# Altium PCB Grabber_DIOT.PCBDOC (part 5 of 7)
Units mm, origin at the board's own origin, x right, y up, seen from the top; angles counter-clockwise.
Board outline 221.14 x 100 mm, 4 copper layers (TopLayer, MidLayer1, Internal layer GND, Bottom Layer), stack 1.607 mm thick; 234 components, 170 nets, 1025 pads, 389 vias.
Unrouted connection lines stored in the file: 2.
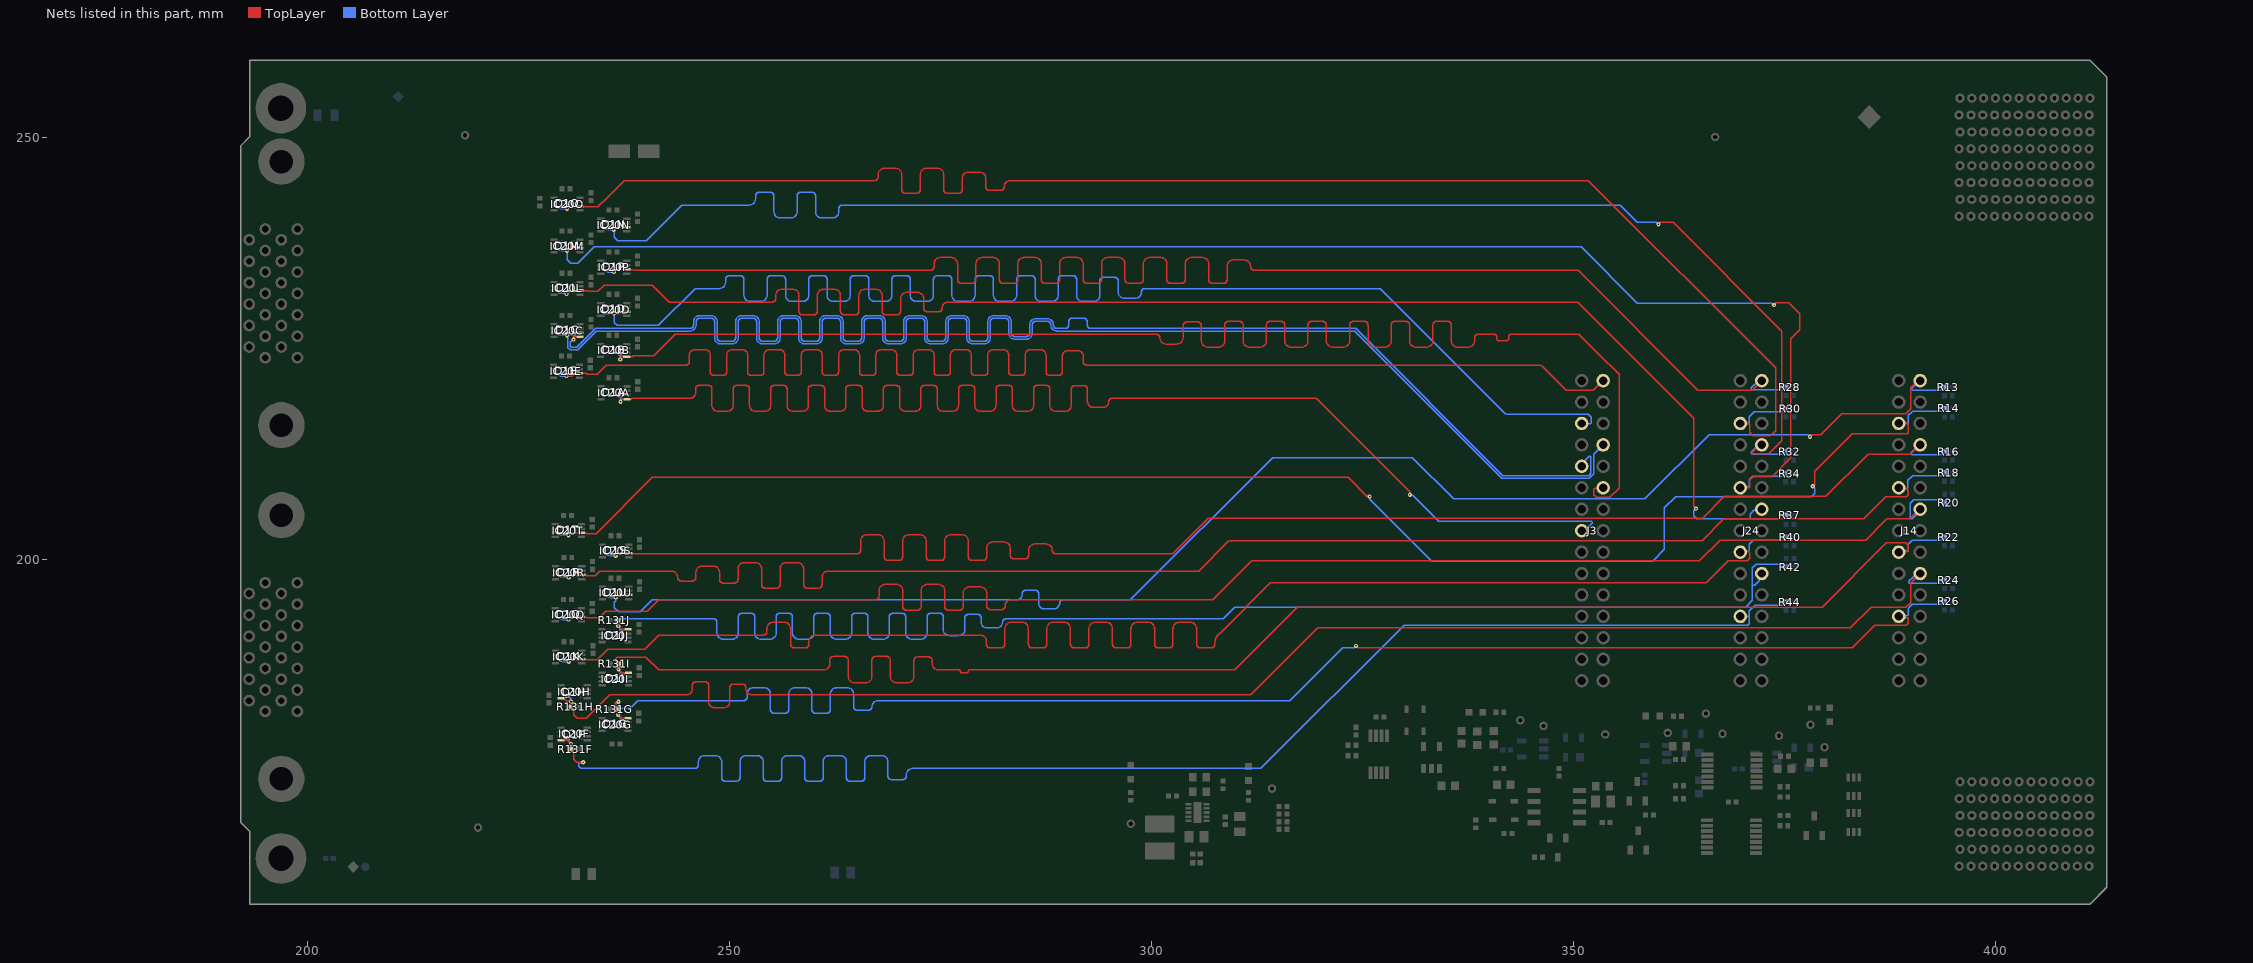
[diagram p6: the nets of this part, all layers, seen from the top]

## Via types
v1: diameter 0.5, hole 0.2, TopLayer to Bottom Layer, tented both sides, 374 vias
v2: diameter 0.8, hole 0.5, TopLayer to Bottom Layer, tented both sides, 15 vias

## Nets (pads, with @x,y where several pads share a name; then routed paths per layer and width w, separated by ;. In a path a pad name is that pad's centre, name@x,y a point inside that pad or via, vN(x,y) a via of type N, cw(c..) or ccw(c..) an arc to the next point about the centre after c; other vN are vias at no path point) (continued)
EEM_IO.LVDS_N18: D1C.6 IC20C.5 J3.9 | length 178.3
  TopLayer w0.152: v1@231.525,226.08 v1(231.554,226.051) ; v1@231.591,226.013 v1(231.554,226.051) ; IC20C.5@232.331,226.367 231.656,226.367 231.554,226.264 v1(231.554,226.051)
  Bottom Layer w0.152: v1(231.554,226.051) 231.493,226.051 231.186,225.744 231.186,225.235 231.275,225.146 231.915,225.146 233.947,227.177 234.047,227.277 234.136,227.366 245.112,227.366 245.341,227.366 ccw(c245.341,227.803) 245.778,227.803 245.778,228.148 cw(c246.52,228.148) 246.52,228.89 247.83,228.89 cw(c247.83,228.148) 248.572,228.148 248.572,226.279 ccw(c249.009,226.279) 249.009,225.842 250.32,225.842 ccw(c250.32,226.279) 250.756,226.279 250.756,228.148 cw(c251.498,228.148) 251.498,228.89 252.809,228.89 cw(c252.809,228.148) 253.55,228.148 253.55,226.279 ccw(c253.987,226.279) 253.987,225.842 255.298,225.842 ccw(c255.298,226.279) 255.735,226.279 255.735,228.148 cw(c256.476,228.148) 256.476,228.89 257.787,228.89 cw(c257.787,228.148) 258.529,228.148 258.529,226.279 ccw(c258.966,226.279) 258.966,225.842 260.276,225.842 ccw(c260.276,226.279) 260.713,226.279 260.713,228.148 cw(c261.455,228.148) 261.455,228.89 262.766,228.89 cw(c262.766,228.148) 263.507,228.148 263.507,226.279 ccw(c263.944,226.279) 263.944,225.842 265.255,225.842 ccw(c265.255,226.279) 265.692,226.279 265.692,228.148 cw(c266.433,228.148) 266.433,228.89 267.744,228.89 cw(c267.744,228.148) 268.486,228.148 268.486,226.279 ccw(c268.922,226.279) 268.922,225.842 270.233,225.842 ccw(c270.233,226.279) 270.67,226.279 270.67,228.148 cw(c271.412,228.148) 271.412,228.89 272.722,228.89 cw(c272.722,228.148) 273.464,228.148 273.464,226.279 ccw(c273.901,226.279) 273.901,225.842 275.212,225.842 ccw(c275.212,226.279) 275.648,226.279 275.648,228.148 cw(c276.39,228.148) 276.39,228.89 277.701,228.89 cw(c277.701,228.148) 278.442,228.148 278.442,226.279 ccw(c278.879,226.279) 278.879,225.842 280.19,225.842 ccw(c280.19,226.279) 280.627,226.279 280.627,228.148 cw(c281.368,228.148) 281.368,228.89 282.679,228.89 cw(c282.679,228.148) 283.421,228.148 283.421,226.838 ccw(c283.858,226.838) 283.858,226.401 285.168,226.401 ccw(c285.168,226.838) 285.605,226.838 285.605,227.803 cw(c286.347,227.803) 286.347,228.545 287.658,228.545 cw(c287.658,227.803) 288.399,227.803 ccw(c288.836,227.803) 288.836,227.366 289.718,227.366 289.794,227.366 ccw(c289.794,227.803) 290.231,227.803 290.231,228.164 cw(c290.668,228.164) 290.668,228.601 291.978,228.601 cw(c291.978,228.164) 292.415,228.164 292.415,227.803 ccw(c292.852,227.803) 292.852,227.366 293.878,227.366 324.236,227.366 341.661,209.941 351.821,209.941 352.105,210.225 352.102,210.229 352.102,212.151 352.013,212.24 351.886,212.24 351.01,211.364 J3.9@351.01,211.032 ; v1@231.571,226.068 D1C.6@231.571,226.692
EEM_IO.LVDS_N19: D1B.6 IC20B.5 J3.12 | length 179.3
  TopLayer w0.152: v1(237.079,223.701) 237.079,223.914 237.181,224.017 IC20B.5@237.856,224.017 238.524,224.017 238.632,224.125 241.032,224.125 243.587,226.681 294.04,226.681 300.586,226.681 cw(c300.586,226.244) 301.023,226.244 ccw(c301.742,226.244) 301.742,225.524 303.053,225.524 ccw(c303.053,226.244) 303.772,226.244 303.772,227.7 cw(c304.209,227.7) 304.209,228.137 305.52,228.137 cw(c305.52,227.7) 305.957,227.7 305.957,225.876 ccw(c306.676,225.876) 306.676,225.157 307.987,225.157 ccw(c307.987,225.876) 308.706,225.876 308.706,227.768 cw(c309.143,227.768) 309.143,228.205 310.454,228.205 cw(c310.454,227.768) 310.89,227.768 310.89,225.876 ccw(c311.61,225.876) 311.61,225.157 312.92,225.157 ccw(c312.92,225.876) 313.64,225.876 313.64,227.768 cw(c314.077,227.768) 314.077,228.205 315.387,228.205 cw(c315.387,227.768) 315.824,227.768 315.824,225.876 ccw(c316.544,225.876) 316.544,225.157 317.854,225.157 ccw(c317.854,225.876) 318.574,225.876 318.574,227.768 cw(c319.01,227.768) 319.01,228.205 320.321,228.205 cw(c320.321,227.768) 320.758,227.768 320.758,225.876 ccw(c321.477,225.876) 321.477,225.157 322.788,225.157 ccw(c322.788,225.876) 323.507,225.876 323.507,227.768 cw(c323.944,227.768) 323.944,228.205 325.255,228.205 cw(c325.255,227.768) 325.692,227.768 325.692,225.876 ccw(c326.411,225.876) 326.411,225.157 327.722,225.157 ccw(c327.722,225.876) 328.441,225.876 328.441,227.768 cw(c328.878,227.768) 328.878,228.205 330.189,228.205 cw(c330.189,227.768) 330.626,227.768 330.626,225.876 ccw(c331.345,225.876) 331.345,225.157 332.656,225.157 ccw(c332.656,225.876) 333.375,225.876 333.375,227.768 cw(c333.812,227.768) 333.812,228.205 335.122,228.205 cw(c335.122,227.768) 335.559,227.768 335.559,225.876 ccw(c336.279,225.876) 336.279,225.157 337.589,225.157 ccw(c337.589,225.876) 338.309,225.876 338.309,226.244 cw(c338.746,226.244) 338.746,226.681 338.963,226.681 339.149,226.681 340.647,226.681 cw(c340.647,226.396) 340.932,226.396 340.932,226.189 ccw(c341.216,226.189) 341.216,225.904 342.07,225.904 ccw(c342.07,226.189) 342.354,226.189 342.354,226.396 cw(c342.639,226.396) 342.639,226.681 344.551,226.681 350.659,226.681 353.015,224.325 353.049,224.325 355.43,221.944 355.43,208.434 354.337,207.341 352.75,207.341 352.417,207.674 352.417,208.32 352.542,208.445 353.503,208.445 J3.12@353.55,208.492
  Bottom Layer w0.152: v1(237.079,223.701) 237.096,223.718 D1B.6@237.096,224.342
EEM_IO.LVDS_N20: D1A.6 IC20A.5 J3.15 | length 179.2
  TopLayer w0.152: v1(237.114,218.677) 237.114,218.89 237.216,218.993 IC20A.5@237.891,218.993 238.392,218.993 238.49,219.09 245.112,219.09 245.336,219.09 ccw(c245.336,219.771) 246.017,219.771 246.017,220.228 cw(c246.403,220.228) 246.403,220.614 247.561,220.614 cw(c247.561,220.228) 247.947,220.228 247.947,218.247 ccw(c248.628,218.247) 248.628,217.566 249.786,217.566 ccw(c249.786,218.247) 250.466,218.247 250.466,220.228 cw(c250.853,220.228) 250.853,220.614 252.011,220.614 cw(c252.011,220.228) 252.397,220.228 252.397,218.247 ccw(c253.077,218.247) 253.077,217.566 254.236,217.566 ccw(c254.236,218.247) 254.916,218.247 254.916,220.228 cw(c255.302,220.228) 255.302,220.614 256.461,220.614 cw(c256.461,220.228) 256.847,220.228 256.847,218.247 ccw(c257.527,218.247) 257.527,217.566 258.686,217.566 ccw(c258.686,218.247) 259.366,218.247 259.366,220.228 cw(c259.752,220.228) 259.752,220.614 260.91,220.614 cw(c260.91,220.228) 261.297,220.228 261.297,218.247 ccw(c261.977,218.247) 261.977,217.566 263.135,217.566 ccw(c263.135,218.247) 263.816,218.247 263.816,220.228 cw(c264.202,220.228) 264.202,220.614 265.36,220.614 cw(c265.36,220.228) 265.746,220.228 265.746,218.247 ccw(c266.427,218.247) 266.427,217.566 267.585,217.566 ccw(c267.585,218.247) 268.266,218.247 268.266,220.228 cw(c268.652,220.228) 268.652,220.614 269.81,220.614 cw(c269.81,220.228) 270.196,220.228 270.196,218.247 ccw(c270.877,218.247) 270.877,217.566 272.035,217.566 ccw(c272.035,218.247) 272.716,218.247 272.716,220.228 cw(c273.102,220.228) 273.102,220.614 274.26,220.614 cw(c274.26,220.228) 274.646,220.228 274.646,218.247 ccw(c275.327,218.247) 275.327,217.566 276.485,217.566 ccw(c276.485,218.247) 277.166,218.247 277.166,220.228 cw(c277.552,220.228) 277.552,220.614 278.71,220.614 cw(c278.71,220.228) 279.096,220.228 279.096,218.247 ccw(c279.777,218.247) 279.777,217.566 280.935,217.566 ccw(c280.935,218.247) 281.615,218.247 281.615,220.228 cw(c282.001,220.228) 282.001,220.614 283.16,220.614 cw(c283.16,220.228) 283.546,220.228 283.546,218.247 ccw(c284.226,218.247) 284.226,217.566 285.385,217.566 ccw(c285.385,218.247) 286.065,218.247 286.065,220.228 cw(c286.451,220.228) 286.451,220.614 287.61,220.614 cw(c287.61,220.228) 287.996,220.228 287.996,218.247 ccw(c288.676,218.247) 288.676,217.566 289.834,217.566 ccw(c289.834,218.247) 290.515,218.247 290.515,220.188 cw(c290.901,220.188) 290.901,220.574 292.059,220.574 cw(c292.059,220.188) 292.445,220.188 292.445,218.704 ccw(c293.126,218.704) 293.126,218.023 294.284,218.023 ccw(c294.284,218.704) 294.965,218.704 cw(c295.351,218.704) 295.351,219.09 297.388,219.09 319.54,219.09 330.617,208.013 330.617,207.705 v1@330.639,207.683
  Bottom Layer w0.152: v1(237.114,218.677) 237.131,218.694 D1A.6@237.131,219.318 ; v1@330.81,207.646 330.81,207.627 330.975,207.627 333.914,204.688 334.093,204.509 352.185,204.509 352.275,204.42 352.275,204.294 351.393,203.412 J3.15@351.269,203.412
  other v1: 330.649,207.673
EEM_IO.LVDS_P0: D1U.1 IC20U.6 J14.2 R13.1 | length 184.4
  TopLayer w0.152: v1(236.562,195.484) 236.562,195.553 236.801,195.792 IC20U.6@238.101,195.792 ; v1(378.059,214.536) 378.072,214.536 378.322,214.786 379.341,214.786 381.794,217.239 389.379,217.239 389.975,217.835 389.975,220.361 390.81,221.195 J14.2@391.011,221.195
  Bottom Layer w0.152: D1U.1@235.761,195.617 235.894,195.484 v1(236.562,195.484) 236.569,195.476 236.569,195.104 236.381,194.916 236.381,194.31 236.393,194.297 236.879,193.812 239.454,193.812 240.848,195.207 283.84,195.207 284.056,195.207 ccw(c284.056,195.872) 284.722,195.872 284.722,195.967 cw(c285.108,195.967) 285.108,196.353 286.266,196.353 cw(c286.266,195.967) 286.652,195.967 286.652,194.821 ccw(c287.318,194.821) 287.318,194.155 288.476,194.155 ccw(c288.476,194.821) 289.141,194.821 cw(c289.527,194.821) 289.527,195.207 290.515,195.207 297.507,195.207 314.375,212.074 330.917,212.074 335.828,207.163 358.494,207.163 366.102,214.771 377.795,214.771 378.03,214.536 v1(378.059,214.536) ; J14.2@391.113,221.195 391.011,221.195 390.091,220.275 390.091,220.149 390.18,220.059 393.627,220.059 393.744,220.176 393.764,220.176 393.978,220.39 R13.1@393.978,220.41
EEM_IO.LVDS_P1: D1T.1 IC20T.6 J14.5 R14.1 | length 186.4
  TopLayer w0.152: v1(230.952,202.858) 230.952,202.927 231.191,203.166 IC20T.6@232.491,203.166 232.992,203.166 233.09,203.068 234.226,203.068 240.784,209.626 240.873,209.715 323.362,209.715 325.566,207.511 325.76,207.511 v1@325.788,207.483 ; v1(378.39,208.671) 378.39,208.715 378.609,208.934 378.609,210.465 383.055,214.911 389.566,214.911 389.691,215.036 389.691,215.974 389.541,216.124 388.585,216.124 J14.5@388.575,216.113
  Bottom Layer w0.152: D1T.1@230.151,202.991 230.284,202.858 v1(230.952,202.858) ; v1@325.885,207.355 325.92,207.32 325.92,207.121 333.229,199.812 359.438,199.812 360.813,201.187 360.813,203.172 360.813,206.131 362.124,207.442 378.239,207.442 378.634,207.838 378.634,208.407 378.464,208.577 378.39,208.577 v1(378.39,208.671) ; J14.5@388.575,216.113 388.585,216.124 389.63,216.124 389.72,216.213 389.72,216.541 389.72,217.065 390.113,217.458 390.194,217.539 393.667,217.539 393.789,217.661 393.789,217.681 R14.1@394.005,217.897
  other v1: 325.878,207.45
EEM_IO.LVDS_P2: D1S.1 IC20S.6 J14.8 R16.1 | length 186.3
  TopLayer w0.152: v1(236.562,200.45) 236.562,200.519 236.801,200.758 IC20S.6@238.101,200.758 238.163,200.695 238.664,200.695 238.7,200.66 264.899,200.66 265.127,200.66 ccw(c265.127,201.097) 265.564,201.097 265.564,202.187 cw(c266.306,202.187) 266.306,202.928 267.617,202.928 cw(c267.617,202.187) 268.358,202.187 268.358,200.317 ccw(c268.795,200.317) 268.795,199.88 270.106,199.88 ccw(c270.106,200.317) 270.543,200.317 270.543,202.187 cw(c271.284,202.187) 271.284,202.928 272.595,202.928 cw(c272.595,202.187) 273.337,202.187 273.337,200.317 ccw(c273.774,200.317) 273.774,199.88 275.084,199.88 ccw(c275.084,200.317) 275.521,200.317 275.521,202.187 cw(c276.263,202.187) 276.263,202.928 277.573,202.928 cw(c277.573,202.187) 278.315,202.187 278.315,200.317 ccw(c278.752,200.317) 278.752,199.88 280.063,199.88 ccw(c280.063,200.317) 280.499,200.317 280.499,201.328 cw(c281.241,201.328) 281.241,202.07 282.552,202.07 cw(c282.552,201.328) 283.293,201.328 283.293,200.508 ccw(c283.73,200.508) 283.73,200.071 285.041,200.071 ccw(c285.041,200.508) 285.478,200.508 285.478,201.097 cw(c286.22,201.097) 286.22,201.839 287.53,201.839 cw(c287.53,201.097) 288.272,201.097 ccw(c288.709,201.097) 288.709,200.66 291.732,200.66 302.53,200.66 306.745,204.875 365.335,204.875 367.92,207.46 379.943,207.46 384.938,212.454 385.19,212.454 385.203,212.442 389.948,212.442 391.08,213.573 J14.8@391.115,213.573
  Bottom Layer w0.152: D1S.1@235.761,200.583 235.894,200.45 v1(236.562,200.45) ; J14.8@391.115,213.573 390.99,213.573 390.039,212.622 390.039,212.496 390.128,212.407 393.629,212.407 393.771,212.549 393.791,212.549 394.005,212.762 R16.1@394.005,212.782
EEM_IO.LVDS_P3: D1R.1 IC20R.6 J14.11 R18.1 | length 186.7
  TopLayer w0.152: v1(230.987,197.867) 230.987,197.936 231.226,198.175 IC20R.6@232.526,198.175 233.027,198.175 233.125,198.077 234.096,198.077 234.64,198.621 240.976,198.621 243.135,198.621 cw(c243.135,197.88) 243.877,197.88 ccw(c244.314,197.88) 244.314,197.443 245.624,197.443 ccw(c245.624,197.88) 246.061,197.88 246.061,198.469 cw(c246.803,198.469) 246.803,199.211 248.113,199.211 cw(c248.113,198.469) 248.855,198.469 248.855,197.635 ccw(c249.292,197.635) 249.292,197.198 250.603,197.198 ccw(c250.603,197.635) 251.039,197.635 251.039,198.879 cw(c251.781,198.879) 251.781,199.62 253.092,199.62 cw(c253.092,198.879) 253.833,198.879 253.833,197.009 ccw(c254.27,197.009) 254.27,196.572 255.581,196.572 ccw(c255.581,197.009) 256.018,197.009 256.018,198.879 cw(c256.76,198.879) 256.76,199.62 258.07,199.62 cw(c258.07,198.879) 258.812,198.879 258.812,197.009 ccw(c259.249,197.009) 259.249,196.572 260.559,196.572 ccw(c260.559,197.009) 260.996,197.009 260.996,197.88 cw(c261.738,197.88) 261.738,198.621 261.967,198.621 305.62,198.621 309.154,202.156 309.243,202.245 365.268,202.245 367.728,204.706 367.818,204.795 384.403,204.795 386.948,207.341 387.037,207.43 389.488,207.43 389.718,207.66 389.718,208.156 389.52,208.354 J14.11@388.714,208.354
  Bottom Layer w0.152: D1R.1@230.186,198 230.319,197.867 v1(230.987,197.867) ; J14.11@388.575,208.493 388.714,208.354 389.52,208.354 389.671,208.504 389.671,208.714 389.671,209.37 390.234,209.933 393.68,209.933 393.771,210.024 393.791,210.024 394.005,210.238 R18.1@394.005,210.258
EEM_IO.LVDS_P4: D1Q.1 IC20Q.6 J14.14 R20.1 | length 188.5
  TopLayer w0.152: v1(230.952,192.884) 230.952,192.953 231.191,193.192 IC20Q.6@232.491,193.192 232.541,193.142 233.066,193.142 233.114,193.094 234.604,193.094 235.38,193.87 240.291,193.87 241.664,195.242 267.097,195.242 267.326,195.242 ccw(c267.326,195.679) 267.763,195.679 267.763,196.304 cw(c268.504,196.304) 268.504,197.046 269.815,197.046 cw(c269.815,196.304) 270.557,196.304 270.557,194.434 ccw(c270.994,194.434) 270.994,193.998 272.304,193.998 ccw(c272.304,194.434) 272.741,194.434 272.741,196.304 cw(c273.483,196.304) 273.483,197.046 274.793,197.046 cw(c274.793,196.304) 275.535,196.304 275.535,194.434 ccw(c275.972,194.434) 275.972,193.998 277.283,193.998 ccw(c277.283,194.434) 277.72,194.434 277.72,196.007 cw(c278.461,196.007) 278.461,196.749 279.772,196.749 cw(c279.772,196.007) 280.514,196.007 280.514,194.5 ccw(c280.95,194.5) 280.95,194.064 282.261,194.064 ccw(c282.261,194.5) 282.698,194.5 cw(c283.44,194.5) 283.44,195.242 285.204,195.242 307.267,195.242 311.773,199.748 311.862,199.838 364.957,199.838 367.41,202.29 384.668,202.29 387.118,204.74 387.207,204.829 389.89,204.829 391.015,205.953 J14.14@391.115,205.953
  Bottom Layer w0.152: D1Q.1@230.151,193.017 230.284,192.884 v1(230.952,192.884) ; J14.14@391.115,205.953 391.115,205.779 390.158,204.823 390.032,204.823 389.943,204.912 389.943,206.679 390.354,207.091 393.646,207.091 393.771,206.966 393.809,206.966 393.975,206.8 R20.1@393.975,206.707
EEM_IO.LVDS_P5: D1I.4 IC20I.8 J14.17 R22.1 R131I.2 | length 185
  TopLayer w0.152: R131I.2@236.866,187.635 R131I.2@236.866,187.655 ; IC20I.8@238.051,186.585 237.27,186.585 v1(236.866,186.989) R131I.2@236.866,187.655 ; J14.17@388.575,200.873 388.643,200.942 389.528,200.942 389.693,201.107 389.693,201.675 389.413,201.955 387.093,201.955 379.488,194.351 317.306,194.351 309.874,186.919 279.757,186.919 278.466,186.919 ccw(c278.466,186.766) 278.313,186.766 278.313,186.723 cw(c278.176,186.723) 278.176,186.586 277.536,186.586 cw(c277.536,186.723) 277.399,186.723 277.399,186.766 ccw(c277.247,186.766) 277.247,186.919 276.256,186.919 276.231,186.919 274.801,186.919 cw(c274.801,187.66) 274.059,187.66 274.059,188.008 ccw(c273.622,188.008) 273.622,188.445 272.311,188.445 ccw(c272.311,188.008) 271.875,188.008 271.875,186.136 cw(c271.133,186.136) 271.133,185.395 269.822,185.395 cw(c269.822,186.136) 269.081,186.136 269.081,188.067 ccw(c268.644,188.067) 268.644,188.504 267.333,188.504 ccw(c267.333,188.067) 266.896,188.067 266.896,186.136 cw(c266.154,186.136) 266.154,185.395 264.844,185.395 cw(c264.844,186.136) 264.102,186.136 264.102,188.067 ccw(c263.665,188.067) 263.665,188.504 262.355,188.504 ccw(c262.355,188.067) 261.918,188.067 261.918,187.66 cw(c261.176,187.66) 261.176,186.919 260.947,186.919 241.643,186.919 240.13,188.432 236.741,188.432 236.548,188.239 236.548,187.958 236.638,187.868 236.652,187.868 R131I.2@236.866,187.655
  Bottom Layer w0.152: v1(236.866,186.989) 237.101,186.754 237.101,186.6 D1I.4@237.291,186.41 ; J14.17@388.575,200.873 388.648,200.946 389.628,200.946 389.718,201.036 389.718,201.838 389.8,201.919 390.157,202.277 393.648,202.277 393.771,202.4 393.791,202.4 394.005,202.613 R22.1@394.005,202.633
EEM_IO.LVDS_P6: D1H.4 IC20H.8 J14.20 R24.1 R131H.2 | length 185.1
  TopLayer w0.152: IC20H.8@230.074,183.574 230.349,183.574 230.753,183.17 v1(231.259,183.17) 231.259,182.504 231.565,182.197 231.565,181.594 231.998,181.162 233.047,181.162 235.855,183.969 244.751,183.969 244.967,183.969 ccw(c244.967,184.635) 245.632,184.635 245.632,185.107 cw(c246.018,185.107) 246.018,185.493 247.177,185.493 cw(c247.177,185.107) 247.563,185.107 247.563,183.111 ccw(c248.228,183.111) 248.228,182.445 249.386,182.445 ccw(c249.386,183.111) 250.052,183.111 250.052,184.827 cw(c250.438,184.827) 250.438,185.213 251.596,185.213 cw(c251.596,184.827) 251.982,184.827 251.982,184.635 ccw(c252.648,184.635) 252.648,183.969 253.709,183.969 311.807,183.969 319.722,191.884 382.84,191.884 385.305,194.349 389.428,194.349 389.973,194.893 389.973,197.157 391.115,198.299 J14.20@391.115,198.333
  Bottom Layer w0.152: D1H.4@230.834,183.749 230.908,183.675 231.048,183.675 231.192,183.531 231.192,183.236 v1(231.259,183.17) ; J14.20@391.115,198.333 390.838,198.056 390.446,198.056 390.354,197.964 390.334,197.964 389.777,197.407 389.777,197.281 389.866,197.192 393.634,197.192 393.769,197.326 393.789,197.326 394.003,197.54 R24.1@394.003,197.56
EEM_IO.LVDS_P7: D1G.4 IC20G.8 J14.23 R26.1 R131G.2 | length 184.7
  TopLayer w0.152: v1(236.866,183.135) 236.8,183.069 236.63,183.069 236.506,182.945 236.506,182.586 236.831,182.262 v1(236.831,181.596) 237.235,181.192 IC20G.8@238.016,181.192 ; v1(324.27,189.757) 324.488,189.54 383.066,189.54 385.622,192.095 385.704,192.177 389.43,192.177 389.481,192.228 389.714,192.461 389.714,192.967 389.561,193.12 388.708,193.12 J14.23@388.575,193.253
  Bottom Layer w0.152: v1(236.831,181.596) 237.066,181.361 237.066,181.207 D1G.4@237.256,181.017 ; v1(236.866,183.135) 236.772,183.135 236.636,182.999 236.63,182.999 236.541,182.91 236.541,182.564 236.71,182.395 238.26,182.395 239.133,183.268 251.474,183.268 251.69,183.268 ccw(c251.69,183.705) 252.127,183.705 252.127,184.076 cw(c252.843,184.076) 252.843,184.792 254.154,184.792 cw(c254.154,184.076) 254.87,184.076 254.87,182.219 ccw(c255.307,182.219) 255.307,181.782 256.618,181.782 ccw(c256.618,182.219) 257.055,182.219 257.055,184.076 cw(c257.771,184.076) 257.771,184.792 259.082,184.792 cw(c259.082,184.076) 259.798,184.076 259.798,182.219 ccw(c260.235,182.219) 260.235,181.782 261.545,181.782 ccw(c261.545,182.219) 261.982,182.219 261.982,184.074 cw(c262.699,184.074) 262.699,184.79 264.009,184.79 cw(c264.009,184.074) 264.726,184.074 264.726,182.552 ccw(c265.162,182.552) 265.162,182.115 266.473,182.115 ccw(c266.473,182.552) 266.91,182.552 cw(c267.626,182.552) 267.626,183.268 268.936,183.268 316.411,183.268 322.683,189.54 324.053,189.54 v1(324.27,189.757) ; J14.23@388.575,193.253 388.625,193.304 389.584,193.304 389.673,193.393 389.673,194.172 389.755,194.254 390.166,194.665 393.647,194.665 393.769,194.787 393.789,194.787 394.003,195.001 R26.1@394.003,195.021
EEM_IO.LVDS_P8: D1P.1 IC20P.6 J24.2 R28.1 | length 186.6
  TopLayer w0.152: v1(236.327,234.059) 236.327,234.128 236.566,234.367 IC20P.6@237.866,234.367 237.897,234.335 238.581,234.335 238.66,234.255 273.613,234.255 273.837,234.255 ccw(c273.837,234.692) 274.273,234.692 274.273,235.047 cw(c275.006,235.047) 275.006,235.779 276.317,235.779 cw(c276.317,235.047) 277.049,235.047 277.049,233.168 ccw(c277.486,233.168) 277.486,232.731 278.797,232.731 ccw(c278.797,233.168) 279.233,233.168 279.233,235.047 cw(c279.966,235.047) 279.966,235.779 281.277,235.779 cw(c281.277,235.047) 282.009,235.047 282.009,233.168 ccw(c282.446,233.168) 282.446,232.731 283.757,232.731 ccw(c283.757,233.168) 284.193,233.168 284.193,235.047 cw(c284.926,235.047) 284.926,235.779 286.237,235.779 cw(c286.237,235.047) 286.969,235.047 286.969,233.168 ccw(c287.406,233.168) 287.406,232.731 288.717,232.731 ccw(c288.717,233.168) 289.153,233.168 289.153,235.047 cw(c289.886,235.047) 289.886,235.779 291.197,235.779 cw(c291.197,235.047) 291.929,235.047 291.929,233.168 ccw(c292.366,233.168) 292.366,232.731 293.677,232.731 ccw(c293.677,233.168) 294.113,233.168 294.113,235.047 cw(c294.846,235.047) 294.846,235.779 296.157,235.779 cw(c296.157,235.047) 296.889,235.047 296.889,233.168 ccw(c297.326,233.168) 297.326,232.731 298.637,232.731 ccw(c298.637,233.168) 299.073,233.168 299.073,235.047 cw(c299.806,235.047) 299.806,235.779 301.117,235.779 cw(c301.117,235.047) 301.849,235.047 301.849,233.168 ccw(c302.286,233.168) 302.286,232.731 303.597,232.731 ccw(c303.597,233.168) 304.033,233.168 304.033,235.047 cw(c304.766,235.047) 304.766,235.779 306.077,235.779 cw(c306.077,235.047) 306.809,235.047 306.809,233.168 ccw(c307.246,233.168) 307.246,232.731 308.557,232.731 ccw(c308.557,233.168) 308.993,233.168 308.993,234.752 cw(c309.726,234.752) 309.726,235.484 311.037,235.484 cw(c311.037,234.752) 311.769,234.752 311.769,234.692 ccw(c312.206,234.692) 312.206,234.255 314.696,234.255 350.578,234.255 364.781,220.052 370.818,220.052 371.205,220.052 372.143,220.99 372.143,221.192 J24.2@372.345,221.192
  Bottom Layer w0.152: D1P.1@235.526,234.192 235.659,234.059 v1(236.327,234.059) ; J24.2@372.345,221.192 371.989,221.192 371.12,220.323 371.12,220.197 371.209,220.107 374.885,220.107 374.964,220.186 374.984,220.186 375.198,220.4 R28.1@375.198,220.42
EEM_IO.LVDS_P9: D1O.1 IC20O.6 J24.5 R30.1 | length 187.1
  TopLayer w0.152: v1(230.792,241.559) 230.792,241.628 231.031,241.867 IC20O.6@232.331,241.867 232.405,241.793 232.748,241.793 232.769,241.772 234.414,241.772 235.585,242.943 237.541,244.898 266.983,244.898 267.212,244.898 ccw(c267.212,245.335) 267.649,245.335 267.649,245.608 cw(c268.39,245.608) 268.39,246.35 269.701,246.35 cw(c269.701,245.608) 270.443,245.608 270.443,243.811 ccw(c270.88,243.811) 270.88,243.374 272.19,243.374 ccw(c272.19,243.811) 272.627,243.811 272.627,245.608 cw(c273.369,245.608) 273.369,246.35 274.679,246.35 cw(c274.679,245.608) 275.421,245.608 275.421,243.811 ccw(c275.858,243.811) 275.858,243.374 277.169,243.374 ccw(c277.169,243.811) 277.605,243.811 277.605,245.166 cw(c278.347,245.166) 278.347,245.907 279.658,245.907 cw(c279.658,245.166) 280.399,245.166 280.399,244.157 ccw(c280.836,244.157) 280.836,243.72 282.147,243.72 ccw(c282.147,244.157) 282.584,244.157 cw(c283.326,244.157) 283.326,244.898 284.171,244.898 351.8,244.898 373.995,222.703 373.995,215.251 373.376,214.632 371.363,214.632 370.932,215.062 370.932,216.013 370.833,216.112 J24.5@369.805,216.112
  Bottom Layer w0.152: D1O.1@229.991,241.692 230.124,241.559 v1(230.792,241.559) ; J24.5@369.855,216.062 369.868,216.076 370.744,216.076 370.867,216.199 370.867,216.901 371.448,217.482 374.851,217.482 375.011,217.643 375.031,217.643 375.245,217.857 R30.1@375.245,217.877
EEM_IO.LVDS_P10: D1N.1 IC20N.6 J24.8 R32.1 | length 184.7
  TopLayer w0.152: v1(236.327,239.059) 236.327,239.128 236.566,239.367 IC20N.6@237.866,239.367 ; v1(360.101,239.712) 360.143,239.712 360.364,239.933 361.866,239.933 374.733,227.066 374.733,214.072 373.172,212.51 371.296,212.51 371.206,212.6 371.206,212.726 372.053,213.572 J24.8@372.345,213.572
  Bottom Layer w0.152: D1N.1@235.526,239.192 235.659,239.059 v1(236.327,239.059) 236.358,239.028 236.358,238.185 236.788,237.755 240.14,237.755 244.384,241.998 252.18,241.998 252.396,241.998 ccw(c252.396,242.715) 253.112,242.715 253.112,243.086 cw(c253.549,243.086) 253.549,243.522 254.86,243.522 cw(c254.86,243.086) 255.297,243.086 255.297,241.191 ccw(c256.013,241.191) 256.013,240.474 257.324,240.474 ccw(c257.324,241.191) 258.04,241.191 258.04,243.086 cw(c258.477,243.086) 258.477,243.522 259.787,243.522 cw(c259.787,243.086) 260.224,243.086 260.224,241.191 ccw(c260.941,241.191) 260.941,240.474 262.251,240.474 ccw(c262.251,241.191) 262.967,241.191 262.967,241.562 cw(c263.404,241.562) 263.404,241.998 264.907,241.998 355.549,241.998 357.617,239.931 359.833,239.931 360.051,239.712 v1(360.101,239.712) ; J24.8@372.345,213.572 371.973,213.572 371.082,212.682 371.082,212.555 371.171,212.466 374.845,212.466 374.934,212.555 374.973,212.555 375.187,212.769 R32.1@375.187,212.789
EEM_IO.LVDS_P11: D1M.1 IC20M.6 J24.11 R34.1 | length 186.1
  TopLayer w0.152: v1(230.792,236.566) 230.792,236.635 231.031,236.874 IC20M.6@232.331,236.874 ; J24.11@369.805,208.492 369.829,208.468 370.833,208.468 370.922,208.557 370.922,208.753 370.922,209.424 371.318,209.819 373.559,209.819 375.768,212.028 375.768,226.136 376.852,227.22 376.852,229.114 375.567,230.398 374.022,230.398 v1@373.819,230.194
  Bottom Layer w0.152: D1M.1@229.991,236.699 230.124,236.566 v1(230.792,236.566) ; v1@230.797,236.561 230.797,235.516 231.193,235.119 232.063,235.119 233.992,237.048 350.932,237.048 357.598,230.382 373.542,230.382 373.79,230.135 v1(373.805,230.135) ; J24.11@369.805,208.492 369.894,208.582 370.782,208.582 370.873,208.673 370.873,209.448 371.276,209.851 374.808,209.851 374.94,209.984 374.96,209.984 375.174,210.197 R34.1@375.174,210.217
EEM_IO.LVDS_P12: D1L.1 IC20L.6 J24.14 R37.1 | length 184.9
  TopLayer w0.152: v1(230.725,231.446) 231.145,231.867 231.982,231.867 IC20L.6@232.331,231.867 ; IC20L.6@232.563,231.837 233.246,231.837 233.325,231.758 234.448,231.758 235.184,232.493 240.882,232.493 242.88,230.495 254.86,230.495 255.076,230.495 ccw(c255.076,230.932) 255.513,230.932 255.513,231.303 cw(c256.229,231.303) 256.229,232.019 257.539,232.019 cw(c257.539,231.303) 258.256,231.303 258.256,229.408 ccw(c258.693,229.408) 258.693,228.971 260.003,228.971 ccw(c260.003,229.408) 260.44,229.408 260.44,231.303 cw(c261.156,231.303) 261.156,232.019 262.467,232.019 cw(c262.467,231.303) 263.183,231.303 263.183,229.408 ccw(c263.62,229.408) 263.62,228.971 264.931,228.971 ccw(c264.931,229.408) 265.368,229.408 265.368,231.303 cw(c266.084,231.303) 266.084,232.019 267.395,232.019 cw(c267.395,231.303) 268.111,231.303 268.111,229.408 ccw(c268.548,229.408) 268.548,228.971 269.858,228.971 ccw(c269.858,229.408) 270.295,229.408 270.295,230.929 cw(c271.012,230.929) 271.012,231.645 272.322,231.645 cw(c272.322,230.929) 273.039,230.929 273.039,229.779 ccw(c273.475,229.779) 273.475,229.342 274.786,229.342 ccw(c274.786,229.779) 275.223,229.779 cw(c275.939,229.779) 275.939,230.495 278.347,230.495 350.564,230.495 364.312,216.747 364.312,206.284 364.55,206.046 v1(364.55,206.021)
  Bottom Layer w0.152: D1L.1@229.991,231.692 230.065,231.618 230.459,231.618 230.631,231.446 v1(230.725,231.446) v1@230.752,231.419 ; v1(364.55,206.021) 364.55,206.019 364.284,205.753 364.284,205.201 364.638,204.847 370.969,204.847 ; J24.14@372.068,205.675 J24.14@372.345,205.952 ; J24.14@372.068,205.953 371.927,205.813 371.405,205.813 370.969,205.377 370.969,204.847 ; R37.1@375.212,205.18 375.177,205.18 374.844,204.847 370.969,204.847
EEM_IO.LVDS_P13: D1K.1 IC20K.6 J24.17 R40.1 | length 186.5
  TopLayer w0.152: v1(230.987,187.885) 230.987,187.954 231.226,188.193 IC20K.6@232.526,188.193 233.027,188.193 233.125,188.095 234.375,188.095 235.625,189.345 239.96,189.345 241.654,191.038 248.434,191.038 254.03,191.038 ccw(c254.03,191.475) 254.466,191.475 254.466,191.821 cw(c255.208,191.821) 255.208,192.562 256.519,192.562 cw(c256.519,191.821) 257.26,191.821 257.26,189.951 ccw(c257.697,189.951) 257.697,189.514 259.008,189.514 ccw(c259.008,189.951) 259.445,189.951 259.445,190.297 cw(c260.187,190.297) 260.187,191.038 260.415,191.038 278.739,191.038 279.735,191.038 cw(c279.735,190.297) 280.477,190.297 280.477,189.951 ccw(c280.914,189.951) 280.914,189.514 282.225,189.514 ccw(c282.225,189.951) 282.662,189.951 282.662,191.821 cw(c283.403,191.821) 283.403,192.562 284.714,192.562 cw(c284.714,191.821) 285.456,191.821 285.456,189.951 ccw(c285.892,189.951) 285.892,189.514 287.203,189.514 ccw(c287.203,189.951) 287.64,189.951 287.64,191.821 cw(c288.382,191.821) 288.382,192.562 289.692,192.562 cw(c289.692,191.821) 290.434,191.821 290.434,189.951 ccw(c290.871,189.951) 290.871,189.514 292.181,189.514 ccw(c292.181,189.951) 292.618,189.951 292.618,191.821 cw(c293.36,191.821) 293.36,192.562 294.671,192.562 cw(c294.671,191.821) 295.412,191.821 295.412,189.951 ccw(c295.849,189.951) 295.849,189.514 297.16,189.514 ccw(c297.16,189.951) 297.597,189.951 297.597,191.821 cw(c298.338,191.821) 298.338,192.562 299.649,192.562 cw(c299.649,191.821) 300.391,191.821 300.391,189.951 ccw(c300.828,189.951) 300.828,189.514 302.138,189.514 ccw(c302.138,189.951) 302.575,189.951 302.575,191.821 cw(c303.317,191.821) 303.317,192.562 304.627,192.562 cw(c304.627,191.821) 305.369,191.821 305.369,189.951 ccw(c305.806,189.951) 305.806,189.514 307.117,189.514 ccw(c307.117,189.951) 307.554,189.951 307.554,190.188 cw(c308.712,190.188) 307.893,191.007 ; 307.893,191.007 308.229,191.343 314.101,197.215 365.742,197.215 368.275,199.748 368.365,199.838 370.641,199.838 370.95,200.146 370.95,200.8 370.861,200.889 369.822,200.889 J24.17@369.805,200.872
  Bottom Layer w0.152: D1K.1@230.186,188.018 230.319,187.885 v1(230.987,187.885) ; J24.17@369.805,200.872 369.907,200.975 370.797,200.975 370.886,201.064 370.886,201.796 371.354,202.264 374.846,202.264 374.986,202.405 375.006,202.405 375.22,202.618 R40.1@375.22,202.638
EEM_IO.LVDS_P14: D1J.4 IC20J.8 J24.20 R42.1 R131J.2 | length 185.9
  TopLayer w0.152: R131J.2@236.838,192.768 v1(236.838,192.122) 237.242,191.718 IC20J.8@238.023,191.718
  Bottom Layer w0.152: D1J.4@237.263,191.543 237.073,191.733 237.073,191.887 v1(236.838,192.122) 236.52,192.439 236.52,192.856 236.619,192.955 245.698,192.955 248.162,192.955 cw(c248.162,192.569) 248.548,192.569 248.548,191.256 ccw(c249.239,191.256) 249.239,190.565 250.397,190.565 ccw(c250.397,191.256) 251.088,191.256 251.088,193.227 cw(c251.474,193.227) 251.474,193.613 252.633,193.613 cw(c252.633,193.227) 253.019,193.227 253.019,191.256 ccw(c253.71,191.256) 253.71,190.565 254.868,190.565 ccw(c254.868,191.256) 255.559,191.256 255.559,193.227 cw(c255.945,193.227) 255.945,193.613 257.103,193.613 cw(c257.103,193.227) 257.489,193.227 257.489,191.256 ccw(c258.18,191.256) 258.18,190.565 259.338,190.565 ccw(c259.338,191.256) 260.029,191.256 260.029,193.227 cw(c260.415,193.227) 260.415,193.613 261.573,193.613 cw(c261.573,193.227) 261.959,193.227 261.959,191.256 ccw(c262.65,191.256) 262.65,190.565 263.809,190.565 ccw(c263.809,191.256) 264.499,191.256 264.499,193.227 cw(c264.886,193.227) 264.886,193.613 266.044,193.613 cw(c266.044,193.227) 266.43,193.227 266.43,191.256 ccw(c267.121,191.256) 267.121,190.565 268.279,190.565 ccw(c268.279,191.256) 268.97,191.256 268.97,193.227 cw(c269.356,193.227) 269.356,193.613 270.514,193.613 cw(c270.514,193.227) 270.9,193.227 270.9,191.256 ccw(c271.591,191.256) 271.591,190.565 272.749,190.565 ccw(c272.749,191.256) 273.44,191.256 273.44,193.227 cw(c273.826,193.227) 273.826,193.613 274.985,193.613 cw(c274.985,193.227) 275.371,193.227 275.371,191.674 ccw(c276.062,191.674) 276.062,190.984 277.22,190.984 ccw(c277.22,191.674) 277.911,191.674 277.911,193.108 cw(c278.297,193.108) 278.297,193.494 279.455,193.494 cw(c279.455,193.108) 279.841,193.108 279.841,192.569 ccw(c280.532,192.569) 280.532,191.878 281.69,191.878 ccw(c281.69,192.569) 282.381,192.569 cw(c282.767,192.569) 282.767,192.955 284.798,192.955 308.528,192.955 309.923,194.351 370.439,194.351 371.235,195.146 371.235,196.91 371.235,198.03 ; 371.235,198.045 371.235,199.002 371.69,199.457 371.698,199.449 374.942,199.449 375.031,199.36 375.031,199.311 R42.1@375.245,199.098 ; 371.251,196.91 371.289,196.949 371.537,196.949 372.068,197.479 372.068,198.055 J24.20@372.345,198.332
EEM_IO.LVDS_P15: D1F.4 IC20F.8 J24.23 R44.1 R131F.2 | length 184.6
  TopLayer w0.152: IC20F.8@230.074,178.574 230.855,178.574 231.259,178.17 v1(231.259,178.13) R131F.2@231.259,177.524 231.259,177.504 231.548,177.214 231.548,176.324 231.916,175.956 232.678,175.956 v1(232.7,175.979)
  Bottom Layer w0.152: D1F.4@230.834,178.749 230.888,178.749 230.961,178.675 230.961,178.467 231.259,178.17 v1@231.259,178.143 ; v1(232.7,175.979) 232.662,175.94 232.367,175.94 232.191,175.764 232.191,175.481 232.434,175.237 245.698,175.237 245.914,175.237 ccw(c245.914,175.674) 246.351,175.674 246.351,176.045 cw(c247.067,176.045) 247.067,176.761 248.378,176.761 cw(c248.378,176.045) 249.094,176.045 249.094,174.15 ccw(c249.531,174.15) 249.531,173.713 250.842,173.713 ccw(c250.842,174.15) 251.279,174.15 251.279,176.045 cw(c251.995,176.045) 251.995,176.761 253.306,176.761 cw(c253.306,176.045) 254.022,176.045 254.022,174.15 ccw(c254.459,174.15) 254.459,173.713 255.769,173.713 ccw(c255.769,174.15) 256.206,174.15 256.206,176.045 cw(c256.923,176.045) 256.923,176.761 258.233,176.761 cw(c258.233,176.045) 258.95,176.045 258.95,174.15 ccw(c259.386,174.15) 259.386,173.713 260.697,173.713 ccw(c260.697,174.15) 261.134,174.15 261.134,176.045 cw(c261.85,176.045) 261.85,176.761 263.161,176.761 cw(c263.161,176.045) 263.877,176.045 263.877,174.15 ccw(c264.314,174.15) 264.314,173.713 265.625,173.713 ccw(c265.625,174.15) 266.062,174.15 266.062,176.045 cw(c266.778,176.045) 266.778,176.761 268.088,176.761 cw(c268.088,176.045) 268.805,176.045 268.805,174.347 ccw(c269.242,174.347) 269.242,173.91 270.552,173.91 ccw(c270.552,174.347) 270.989,174.347 270.989,174.521 cw(c271.705,174.521) 271.705,175.237 275.675,175.237 313,175.237 329.968,192.205 370.68,192.205 370.883,192.408 370.883,193.241 ; J24.23@370.04,193.017 J24.23@369.805,193.252 369.816,193.241 370.883,193.241 ; 370.883,193.397 370.883,193.897 371.583,194.597 374.836,194.597 374.948,194.709 374.985,194.709 375.199,194.923 R44.1@375.199,194.943 ; 370.883,193.412 370.883,193.241
EEM_IO.LVDS_P16: D1E.1 IC20E.6 J3.2 | length 180.6
  TopLayer w0.152: v1(230.727,221.734) 231.366,221.734 231.674,222.042 IC20E.6@232.266,222.042 233.059,222.042 233.182,221.919 234.341,221.919 235.369,222.946 235.45,223.028 244.669,223.028 244.885,223.028 ccw(c244.885,223.414) 245.271,223.414 245.271,224.197 cw(c245.937,224.197) 245.937,224.862 247.095,224.862 cw(c247.095,224.197) 247.76,224.197 247.76,222.2 ccw(c248.147,222.2) 248.147,221.814 249.305,221.814 ccw(c249.305,222.2) 249.691,222.2 249.691,224.197 cw(c250.356,224.197) 250.356,224.862 251.515,224.862 cw(c251.515,224.197) 252.18,224.197 252.18,222.2 ccw(c252.566,222.2) 252.566,221.814 253.724,221.814 ccw(c253.724,222.2) 254.11,222.2 254.11,224.197 cw(c254.776,224.197) 254.776,224.862 255.934,224.862 cw(c255.934,224.197) 256.6,224.197 256.6,222.2 ccw(c256.986,222.2) 256.986,221.814 258.144,221.814 ccw(c258.144,222.2) 258.53,222.2 258.53,224.197 cw(c259.196,224.197) 259.196,224.862 260.354,224.862 cw(c260.354,224.197) 261.019,224.197 261.019,222.2 ccw(c261.405,222.2) 261.405,221.814 262.564,221.814 ccw(c262.564,222.2) 262.95,222.2 262.95,224.197 cw(c263.615,224.197) 263.615,224.862 264.773,224.862 cw(c264.773,224.197) 265.439,224.197 265.439,222.2 ccw(c265.825,222.2) 265.825,221.814 266.983,221.814 ccw(c266.983,222.2) 267.369,222.2 267.369,224.197 cw(c268.035,224.197) 268.035,224.862 269.193,224.862 cw(c269.193,224.197) 269.858,224.197 269.858,222.2 ccw(c270.245,222.2) 270.245,221.814 271.403,221.814 ccw(c271.403,222.2) 271.789,222.2 271.789,224.197 cw(c272.454,224.197) 272.454,224.862 273.613,224.862 cw(c273.613,224.197) 274.278,224.197 274.278,222.2 ccw(c274.664,222.2) 274.664,221.814 275.822,221.814 ccw(c275.822,222.2) 276.208,222.2 276.208,224.197 cw(c276.874,224.197) 276.874,224.862 278.032,224.862 cw(c278.032,224.197) 278.698,224.197 278.698,222.2 ccw(c279.084,222.2) 279.084,221.814 280.242,221.814 ccw(c280.242,222.2) 280.628,222.2 280.628,224.197 cw(c281.294,224.197) 281.294,224.862 282.452,224.862 cw(c282.452,224.197) 283.117,224.197 283.117,222.2 ccw(c283.503,222.2) 283.503,221.814 284.662,221.814 ccw(c284.662,222.2) 285.048,222.2 285.048,224.197 cw(c285.713,224.197) 285.713,224.862 286.871,224.862 cw(c286.871,224.197) 287.537,224.197 287.537,222.2 ccw(c287.923,222.2) 287.923,221.814 289.081,221.814 ccw(c289.081,222.2) 289.467,222.2 289.467,224.068 cw(c290.133,224.068) 290.133,224.734 291.291,224.734 cw(c291.291,224.068) 291.956,224.068 291.956,223.414 ccw(c292.343,223.414) 292.343,223.028 296.886,223.028 346.185,223.028 346.267,222.946 349.191,220.022 352.38,220.022 J3.2@353.55,221.192
  Bottom Layer w0.152: D1E.1@229.926,221.867 230.059,221.734 v1(230.727,221.734) v1@230.66,221.667
EEM_IO.LVDS_P17: D1D.1 IC20D.6 J3.5 | length 178.6
  TopLayer w0.152: v1(236.34,229.141) 237.055,229.141 237.281,229.367 IC20D.6@237.866,229.367
  Bottom Layer w0.152: D1D.1@235.526,229.192 235.551,229.166 236.315,229.166 v1(236.34,229.141) 236.373,229.109 236.373,228.054 236.703,227.723 241.613,227.723 245.992,232.103 248.628,232.103 248.843,232.103 ccw(c248.843,232.819) 249.56,232.819 249.56,233.19 cw(c249.997,233.19) 249.997,233.627 251.307,233.627 cw(c251.307,233.19) 251.744,233.19 251.744,231.295 ccw(c252.46,231.295) 252.46,230.579 253.771,230.579 ccw(c253.771,231.295) 254.487,231.295 254.487,233.19 cw(c254.924,233.19) 254.924,233.627 256.235,233.627 cw(c256.235,233.19) 256.672,233.19 256.672,231.295 ccw(c257.388,231.295) 257.388,230.579 258.699,230.579 ccw(c258.699,231.295) 259.415,231.295 259.415,233.19 cw(c259.852,233.19) 259.852,233.627 261.162,233.627 cw(c261.162,233.19) 261.599,233.19 261.599,231.295 ccw(c262.316,231.295) 262.316,230.579 263.626,230.579 ccw(c263.626,231.295) 264.343,231.295 264.343,233.19 cw(c264.779,233.19) 264.779,233.627 266.09,233.627 cw(c266.09,233.19) 266.527,233.19 266.527,231.295 ccw(c267.243,231.295) 267.243,230.579 268.554,230.579 ccw(c268.554,231.295) 269.27,231.295 269.27,233.19 cw(c269.707,233.19) 269.707,233.627 271.018,233.627 cw(c271.018,233.19) 271.455,233.19 271.455,231.295 ccw(c272.171,231.295) 272.171,230.579 273.481,230.579 ccw(c273.481,231.295) 274.198,231.295 274.198,233.19 cw(c274.635,233.19) 274.635,233.627 275.945,233.627 cw(c275.945,233.19) 276.382,233.19 276.382,231.295 ccw(c277.098,231.295) 277.098,230.579 278.409,230.579 ccw(c278.409,231.295) 279.125,231.295 279.125,233.19 cw(c279.562,233.19) 279.562,233.627 280.873,233.627 cw(c280.873,233.19) 281.31,233.19 281.31,231.295 ccw(c282.026,231.295) 282.026,230.579 283.337,230.579 ccw(c283.337,231.295) 284.053,231.295 284.053,233.19 cw(c284.49,233.19) 284.49,233.627 285.8,233.627 cw(c285.8,233.19) 286.237,233.19 286.237,231.295 ccw(c286.954,231.295) 286.954,230.579 288.264,230.579 ccw(c288.264,231.295) 288.981,231.295 288.981,233.19 cw(c289.417,233.19) 289.417,233.627 290.728,233.627 cw(c290.728,233.19) 291.165,233.19 291.165,231.295 ccw(c291.881,231.295) 291.881,230.579 293.192,230.579 ccw(c293.192,231.295) 293.908,231.295 293.908,232.982 cw(c294.345,232.982) 294.345,233.419 295.656,233.419 cw(c295.656,232.982) 296.093,232.982 296.093,231.666 ccw(c296.809,231.666) 296.809,230.949 298.119,230.949 ccw(c298.119,231.666) 298.836,231.666 cw(c299.273,231.666) 299.273,232.103 300.192,232.103 327.152,232.103 341.97,217.284 342.052,217.202 351.786,217.202 352.14,216.848 352.14,216.225 352.022,216.107 351.341,216.107 J3.5@351.246,216.013
EEM_IO.LVDS_P18: D1C.1 IC20C.6 J3.8 | length 178.8
  TopLayer w0.152: v1(230.792,226.559) 231.314,226.559 231.622,226.867 IC20C.6@232.331,226.867
  Bottom Layer w0.152: D1C.1@229.991,226.692 230.124,226.559 v1@230.737,226.559 ; v1(230.792,226.559) 230.792,226.464 230.881,226.375 230.881,225.109 231.149,224.841 232.042,224.841 234.262,227.061 245.112,227.061 245.341,227.061 ccw(c245.341,227.803) 246.083,227.803 246.083,228.148 cw(c246.52,228.148) 246.52,228.585 247.83,228.585 cw(c247.83,228.148) 248.267,228.148 248.267,226.279 ccw(c249.009,226.279) 249.009,225.537 250.32,225.537 ccw(c250.32,226.279) 251.061,226.279 251.061,228.148 cw(c251.498,228.148) 251.498,228.585 252.809,228.585 cw(c252.809,228.148) 253.246,228.148 253.246,226.279 ccw(c253.987,226.279) 253.987,225.537 255.298,225.537 ccw(c255.298,226.279) 256.04,226.279 256.04,228.148 cw(c256.476,228.148) 256.476,228.585 257.787,228.585 cw(c257.787,228.148) 258.224,228.148 258.224,226.279 ccw(c258.966,226.279) 258.966,225.537 260.276,225.537 ccw(c260.276,226.279) 261.018,226.279 261.018,228.148 cw(c261.455,228.148) 261.455,228.585 262.766,228.585 cw(c262.766,228.148) 263.202,228.148 263.202,226.279 ccw(c263.944,226.279) 263.944,225.537 265.255,225.537 ccw(c265.255,226.279) 265.996,226.279 265.996,228.148 cw(c266.433,228.148) 266.433,228.585 267.744,228.585 cw(c267.744,228.148) 268.181,228.148 268.181,226.279 ccw(c268.922,226.279) 268.922,225.537 270.233,225.537 ccw(c270.233,226.279) 270.975,226.279 270.975,228.148 cw(c271.412,228.148) 271.412,228.585 272.722,228.585 cw(c272.722,228.148) 273.159,228.148 273.159,226.279 ccw(c273.901,226.279) 273.901,225.537 275.212,225.537 ccw(c275.212,226.279) 275.953,226.279 275.953,228.148 cw(c276.39,228.148) 276.39,228.585 277.701,228.585 cw(c277.701,228.148) 278.138,228.148 278.138,226.279 ccw(c278.879,226.279) 278.879,225.537 280.19,225.537 ccw(c280.19,226.279) 280.932,226.279 280.932,228.148 cw(c281.368,228.148) 281.368,228.585 282.679,228.585 cw(c282.679,228.148) 283.116,228.148 283.116,226.838 ccw(c283.858,226.838) 283.858,226.096 285.168,226.096 ccw(c285.168,226.838) 285.91,226.838 285.91,227.803 cw(c286.347,227.803) 286.347,228.24 287.658,228.24 cw(c287.658,227.803) 288.094,227.803 ccw(c288.836,227.803) 288.836,227.061 289.718,227.061 324.109,227.061 341.534,209.636 351.947,209.636 352.036,209.726 352.321,210.01 352.41,210.099 352.41,210.352 352.407,210.355 352.407,212.467 353.512,213.572 J3.8@353.55,213.572